# EAGLE board WeatherStationPCB (EAGLE 9.7.0)
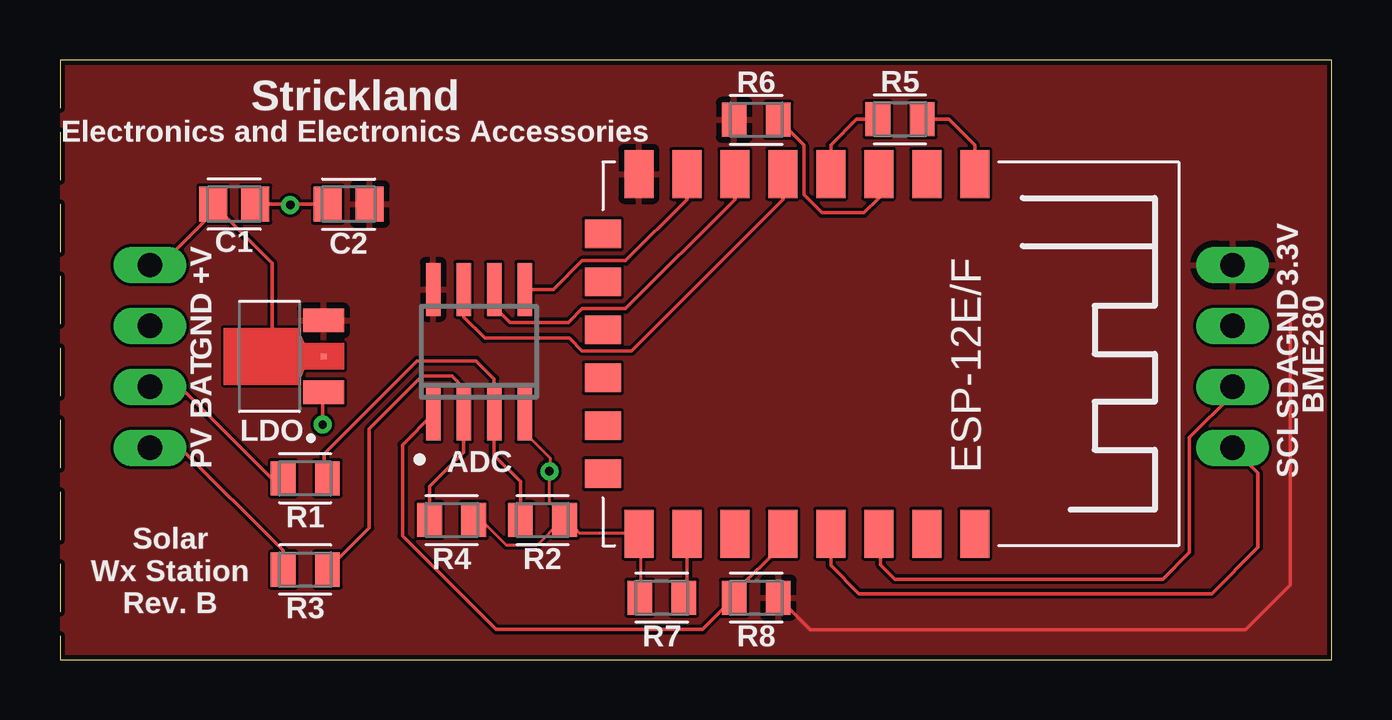
[diagram p0: board, top side]
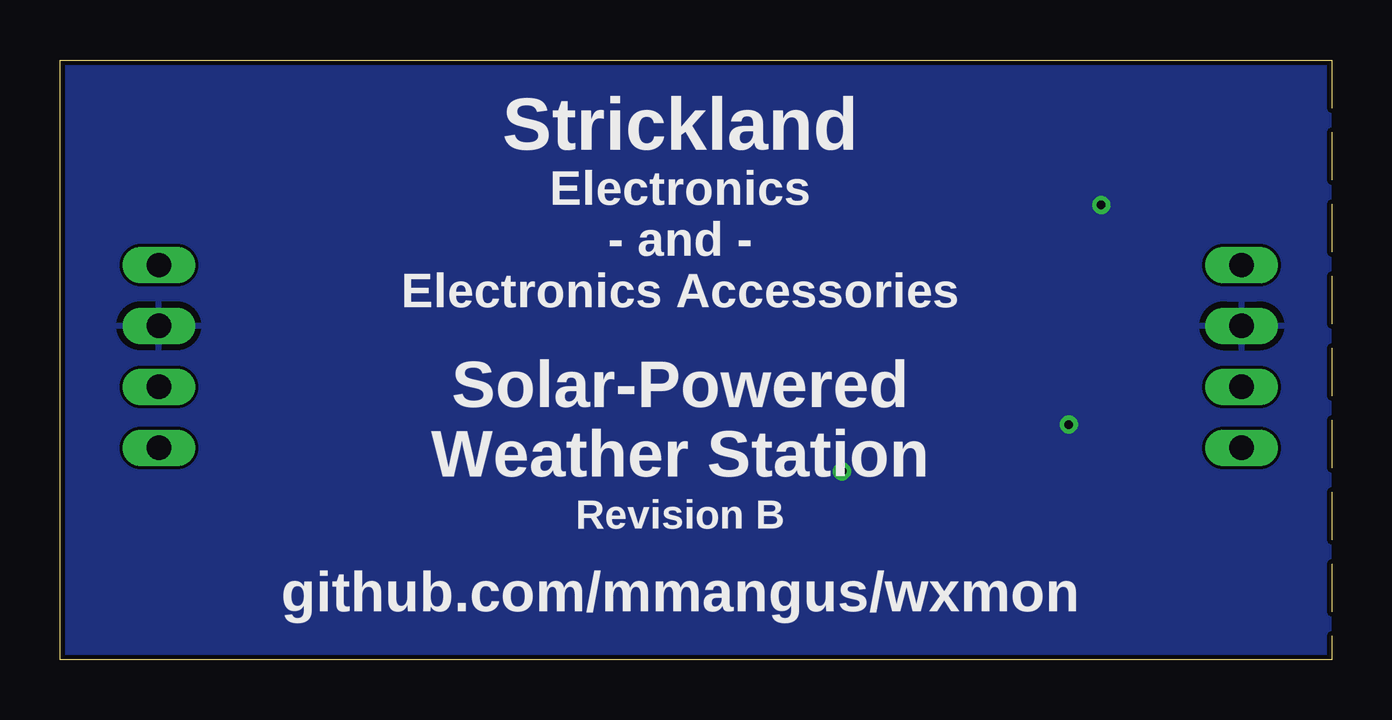
[diagram p1: board, bottom side, seen from below]

Size 53 x 25 mm. Coordinates in mm from the lower left corner, seen from the top.
Outline: 0,0 53,0 53,25 0,25 0,0
Copper layers (1*16): Top 0.035mm / dielectric 1.5mm / Bottom 0.035mm
Design rules "JLC_PCB *": minimum track width 5mil, minimum drill 0.2mm, track to track 5mil, track to pad 0.2mm, pad to pad 5mil, via to via 0.54mm, smd to smd 5mil, copper to edge 0.2mm, drill to drill 0.2mm, minimum pad ring 10mil, minimum via ring 8mil, stop-mask expansion 4mil, vias tented up to drill 0mil, thermal gap 10mil

## Footprints (pad centres in the part's own frame; a part is rotated, then mirrored left to right if it is on the bottom)
SO-08 = smd 0.6 x 2.2: 1 -1.905,-2.6; 2 -0.635,-2.6; 3 0.635,-2.6; 4 1.905,-2.6; 5 1.905,2.6; 6 0.635,2.6; 7 -0.635,2.6; 8 -1.905,2.6
CAPC2012X110 = smd 1.165 x 1.465: 1 -0.875,0; 2 0.875,0
ESP-12E = smd 2 x 1.2: ADC -7.46,5.53; EN -7.46,3.53; GND 7.54,-6.47; IO0 7.54,-0.47; IO2 7.54,-2.47; IO4 7.54,1.53; IO5 7.54,3.53; IO12 -7.46,-2.47; IO13 -7.46,-4.47; IO14 -7.46,-0.47; IO15 7.54,-4.47; IO16 -7.46,1.53; RST -7.46,7.53; RXD/IO3 7.54,5.53; TXD/IO1 7.54,7.53; VCC -7.46,-6.47 | smd 1.2 x 1.5: CS0 -4.96,-7.97; IO9 -0.96,-7.97; IO10 1.04,-7.97; MISO -2.96,-7.97; MOSI 3.04,-7.97; SCLK 5.04,-7.97
1X04 = drill 1.016 long: 1 -3.81,0; 2 -1.27,0; 3 1.27,0; 4 3.81,0
1X04/90 = drill 1.016 long: 1 -3.81,-3.81; 2 -1.27,-3.81; 3 1.27,-3.81; 4 3.81,-3.81
REG-MCP1700TA-4P6X2P6-3SM-H1P6 = smd 0.988 x 1.707: 1 -1.5,-1.652; 3 1.5,-1.652 | smd 0.254 x 0.254: 2 0,-1.652
RESC2012X65 = smd 1.031 x 1.42: 1 -0.919,0; 2 0.919,0

## Placement (x,y rotation side)
ADC  MCP3002SN  [SO-08]  17.46,12.83 0 top
C1  1uF  [CAPC2012X110]  7.26,18.99 0 top
C2  1uF  [CAPC2012X110]  12.04,18.99 180 top
IC1  ESP-12E/F  [ESP-12E]  30.6,12.79 270 top
JP1  PINHD-1X4  [1X04]  48.88,12.64 270 top
JP2  PINHD-1X4/90  [1X04/90]  -0.06,12.64 90 top
LDO  MCP1700T-3302E/MB  [REG-MCP1700TA-4P6X2P6-3SM-H1P6]  9.34,12.64 90 top
R1  6K8  [RESC2012X65]  10.23,7.56 180 top
R2  10K  [RESC2012X65]  20.11,5.82 180 top
R3  6K8  [RESC2012X65]  10.23,3.75 0 top
R4  10K  [RESC2012X65]  16.32,5.82 180 top
R5  1K  [RESC2012X65]  35.01,22.53 180 top
R6  1K  [RESC2012X65]  29.02,22.51 180 top
R7  470R  [RESC2012X65]  25.08,2.58 0 top
R8  10K  [RESC2012X65]  29.02,2.58 0 top

## Library data of the parts
ADC = microchip; MF: MICROCHIP; MPN: MCP3202-CI/SN; OC_FARNELL: 1196803; OC_NEWARK: 19C7207; SPICEPREFIX: X
C1 C2 = Capacitor; CATEGORY: Capacitor
IC1 = esp-12e-f
JP1 JP2 = jumper_resilkscreen; CATEGORY: CONNECTOR; SUB-CATEGORY: PIN-HEADER
LDO = MCP1700T-3302E_MB; MANUFACTURER: Microchip; PACKAGE: REG-MCP1700TA-4P6X2P6-3SM-H1P6
R1-R8 = Resistor; CATEGORY: Resistor; SUB-CATEGORY: Fixed

## Nets
+3.3V: ADC.8 C2.1 IC1.VCC JP1.1 LDO.3 R6.2 R8.2
BOOT: IC1.IO15 R7.2
CLK: ADC.7 IC1.IO14
CS: ADC.1 IC1.IO0 R8.1
EN: IC1.EN R6.1
GND: ADC.4 C1.2 C2.2 IC1.GND JP1.2 JP2.3 LDO.1 R2.1 R4.1 R7.1
MISO: ADC.6 IC1.IO12
MOSI: ADC.5 IC1.IO13
RST: IC1.RST R5.1
SCL: IC1.IO5 JP1.3
SDA: IC1.IO4 JP1.4
V_BAT: JP2.2 R1.2
V_BAT_DIV: ADC.3 R1.1 R2.2
V_IN: C1.1 JP2.4 LDO.2
V_SOL: JP2.1 R3.1
V_SOL_DIV: ADC.2 R3.2 R4.2
WAKE: IC1.IO16 R5.2

## Tracks (layer width: path | path; a pad name or v marks a point on that pad's centre or on a via)
+3.3V
  Top 0.152: 51.29,14.04 51.29,3.11 49.41,1.24 31.28,1.24 R8.2 | 28.01,22.6 R6.2 | ADC.8 15.56,16.34 | IC1.VCC 24.13,20.43 23.66,20.9
  pour Top: 0.08,0.13 52.87,0.13 52.87,24.87 0.08,24.87
BOOT
  Top 0.152: IC1.IO15 26.13,2.7 R7.2
CLK
  Top 0.152: ADC.7 16.83,14.29 17.72,13.4 21.24,13.4 21.77,12.87 23.83,12.87 30.13,19.17 IC1.IO14
CS
  Top 0.152: ADC.1 14.28,8.95 14.28,5.16 18.18,1.26 26.78,1.26 R8.1 28.1,2.77 30.13,4.8 IC1.IO0
EN
  Top 0.152: R6.1 31.01,21.44 31.01,19.38 31.76,18.63 33.51,18.63 34.13,19.25 IC1.EN
GND  (via drill 0.35)
  Top 0.127: R7.1 24.2,2.61 24.2,5.15 IC1.GND 24.07,5.27 21.66,5.27 21.15,5.78 R2.1 | 19.37,9.47 20.42,8.41 20.42,7.87 v20.4,7.85 20.4,6.57 20.96,6.01 20.96,5.97 21.02,5.91 R2.1 | R4.1 17.34,5.78 17.59,5.78 18.61,4.77 19.88,4.77 20.89,5.78 R2.1
  Top 0.152: R2.1 20.93,5.82 | 24.13,2.61 R7.1 | ADC.4 19.37,9.47 19.37,9.43 | LDO.1 10.9,11.05 | 10.9,11.05 10.89,11.04 | 8.14,19.14 C1.2 9.6,18.99 | v10.95,9.8 10.95,11 10.9,11 10.9,11.05 | v9.6,18.95 9.6,18.99 | 9.6,18.99 C2.2
  pour Bottom: 0.08,0.13 52.87,0.13 52.87,24.87 0.08,24.87
MISO
  Top 0.152: ADC.6 18.1,14.73 18.77,14.06 21.2,14.06 21.77,14.63 23.58,14.63 28.13,19.17 IC1.IO12
MOSI
  Top 0.152: ADC.5 20.57,15.43 21.77,16.63 23.58,16.63 26.13,19.17 IC1.IO13
RST
  Top 0.152: IC1.RST 38.13,21.44 37.04,22.53 R5.1
SCL
  Top 0.152: IC1.IO5 34.2,5.18 34.2,3.95 34.8,3.35 45.97,3.35 47.08,4.46 47.08,9.26 48.88,11.06 JP1.3
SDA
  Top 0.152: JP1.4 49.93,7.78 49.93,4.68 48,2.75 33.3,2.75 32.13,3.92 IC1.IO4
V_BAT
  Top 0.152: JP2.2 5.02,11.37 8.83,7.56 R1.2
V_BAT_DIV
  Top 0.152: R1.1 11.02,7.69 11.02,8.58 14.89,12.45 17.35,12.45 18.1,11.7 ADC.3 18.1,8.51 19.19,7.42 R2.2
V_IN
  Top 0.152: JP2.4 4.2,16.45 6.39,18.63 C1.1 8.85,16.53 8.85,13.85 10.06,12.64 LDO.2
V_SOL
  Top 0.152: R3.1 9.3,4.54 5.02,8.83 JP2.1
V_SOL_DIV
  Top 0.152: R3.2 12.89,5.5 12.89,9.61 15.1,11.81 16.34,11.81 16.83,11.32 ADC.2 16.83,8.64 15.41,7.22 R4.2
WAKE
  Top 0.152: R5.2 33.21,22.53 32.13,21.45 IC1.IO16
(copper drawn outside any net)
  shapes: Bottom area x1, Top area x1

## Text on the board
tNames: Strickland | Electronics and Electronics Accessories | 3.3V | +V | GND | GND | BME280 | BAT | SDA | PV | SCL | Solar / Wx Station / Rev. B
bNames: Strickland | Electronics / - and - / Electronics Accessories | Solar-Powered / Weather Station | Revision B | github.com/mmangus/wxmon